# Altium PCB 海关全向控制器视频采集卡转接板V4.PcbDoc
Units mm, origin at the board's own origin, x right, y up, seen from the top; angles counter-clockwise.
Board outline 85.2 x 49.8 mm, 2 copper layers (Top Layer, Bottom Layer), stack 1.671 mm thick; 10 components, 11 nets, 53 pads, 668 vias.
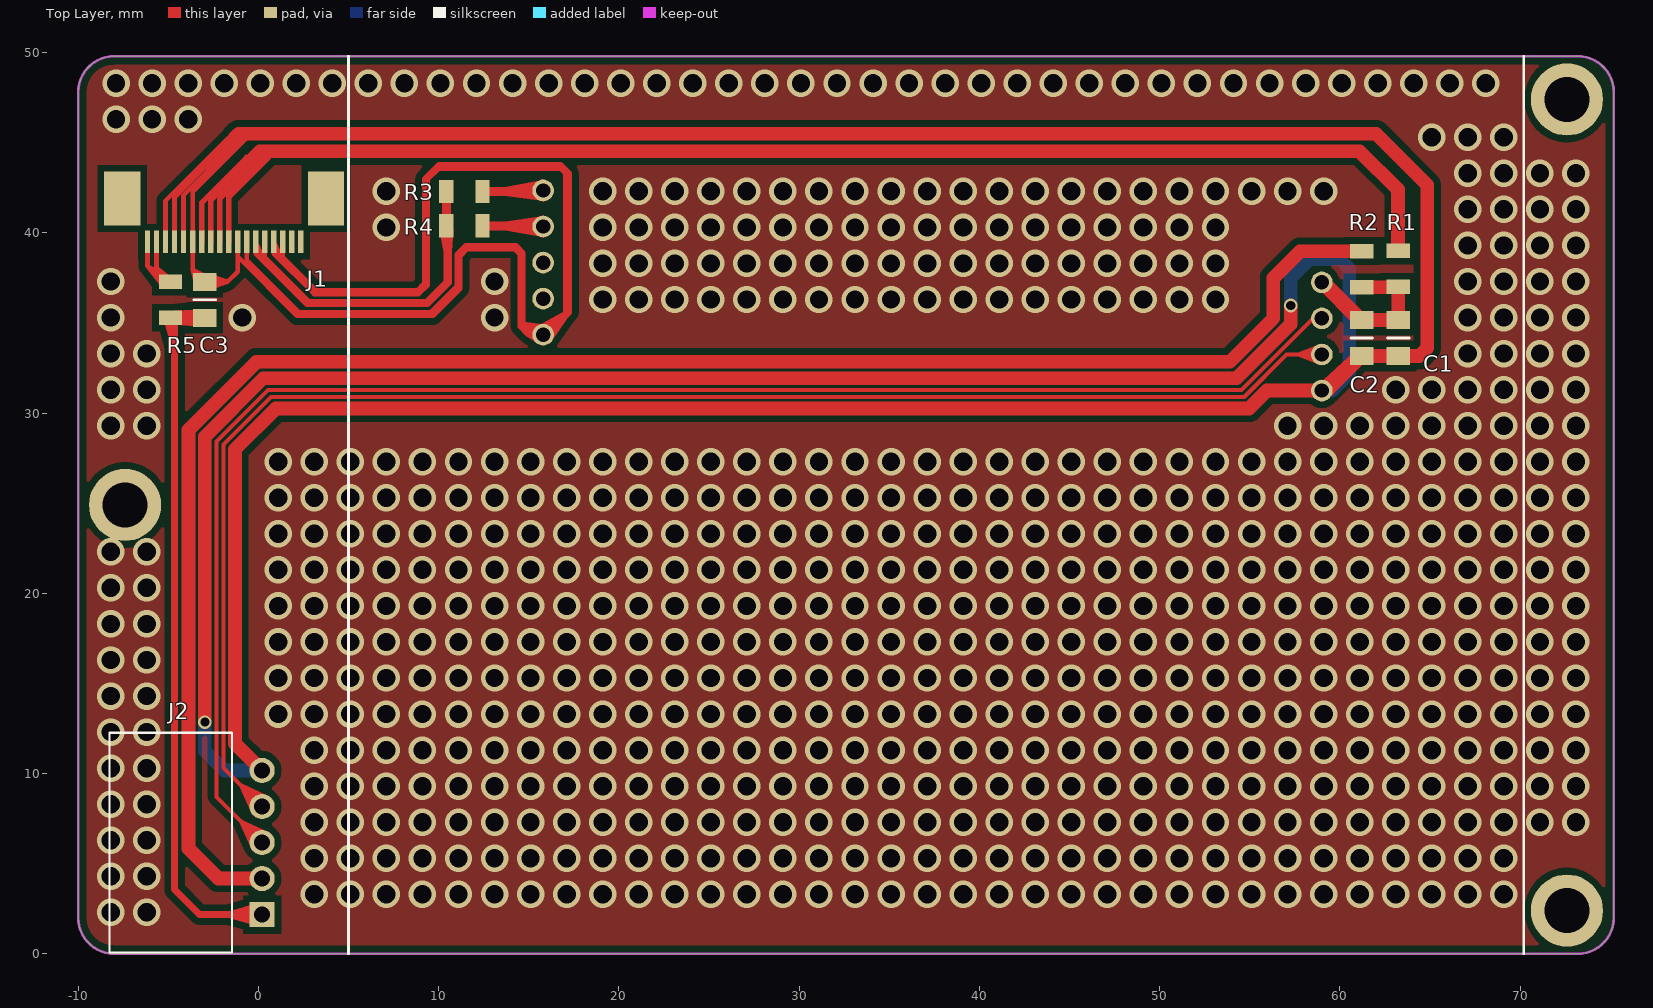
[diagram p0: Top Layer view]
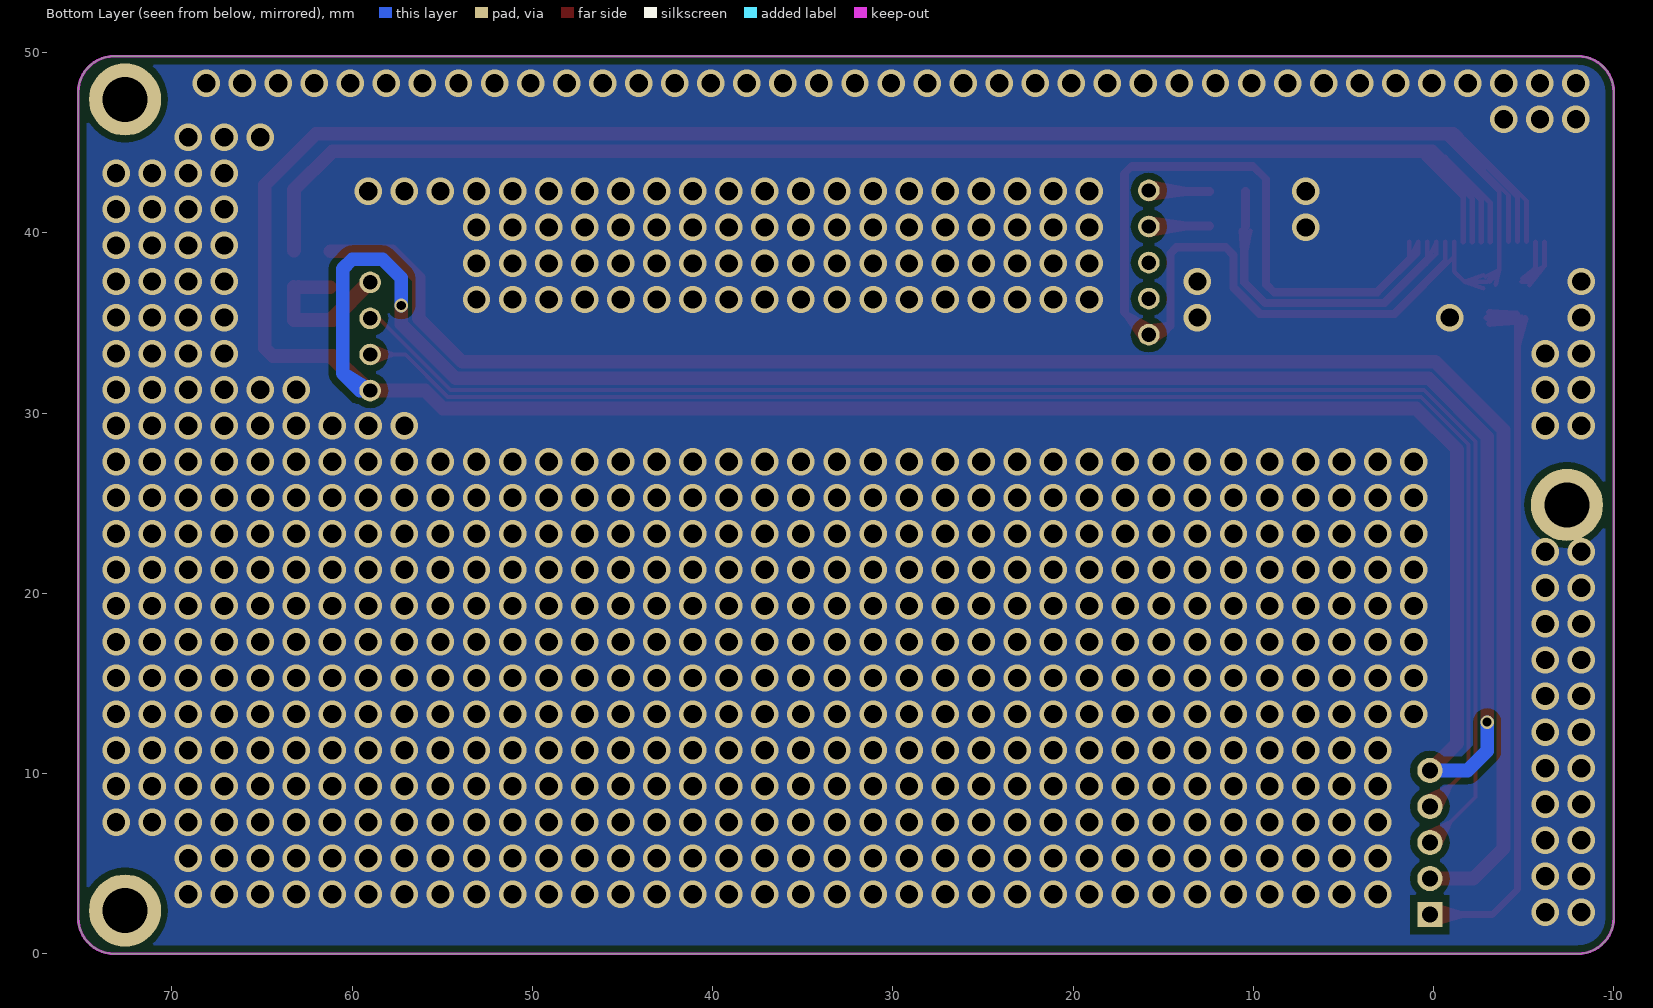
[diagram p1: Bottom Layer view, seen from below]
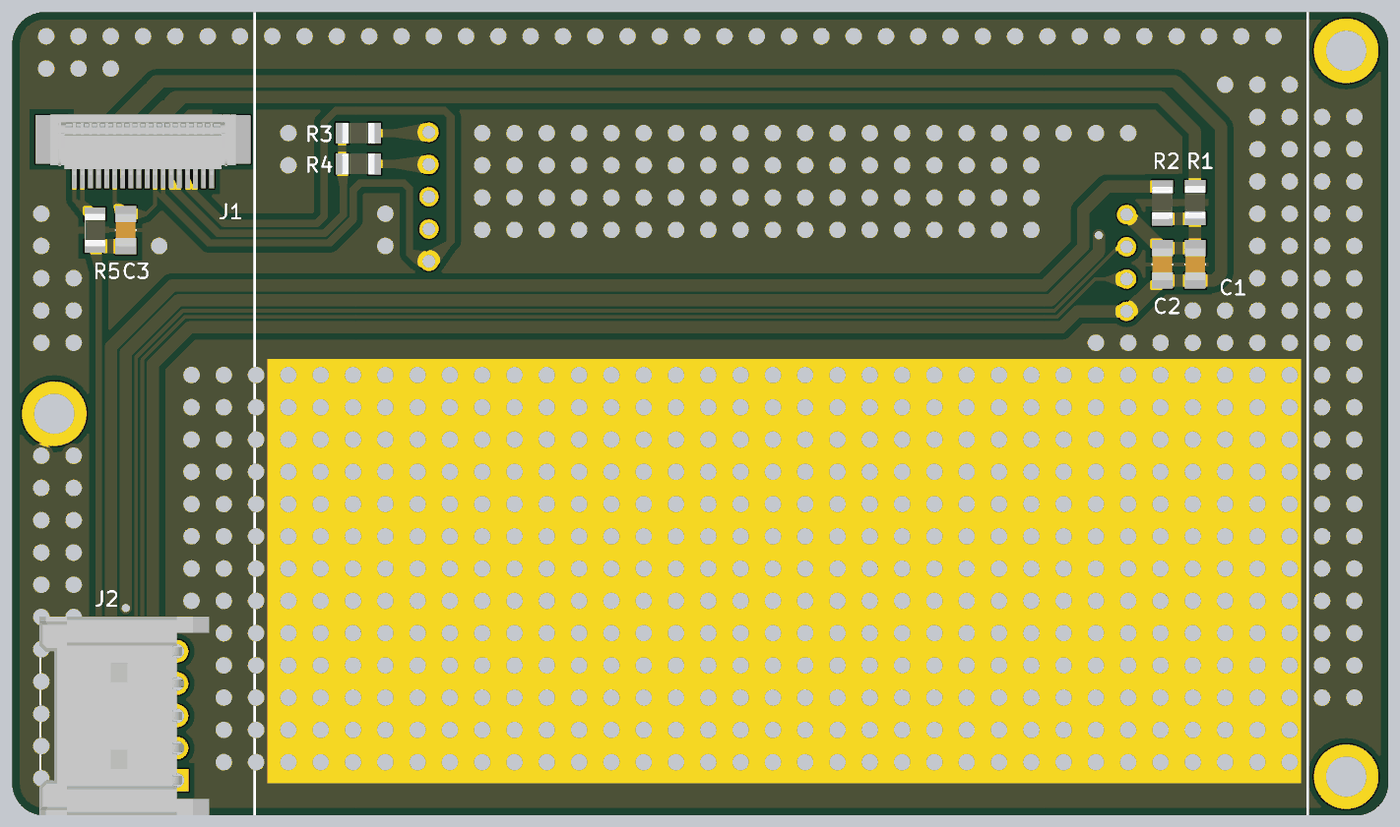
[diagram p2: 3D render of the assembled board from above, using the file's embedded part models]

## Layer stack, top to bottom
Top Solder: solder mask 0.0102, Solder Resist, Dk 3.5
Top Layer: signal copper 0.0356
Dielectric 1: dielectric 1.6, FR-4, Dk 4.8
Bottom Layer: signal copper 0.0356
Bottom Solder: solder mask 0.0102, Solder Resist, Dk 3.5

## Board outline
-10,2 ccw(c-8,2) -8,0 73.2,0 ccw(c73.2,2) 75.2,2 75.2,47.8 ccw(c73.2,47.8) 73.2,49.8 -8,49.8 ccw(c-8,47.8) -10,47.8

## Design rules (kind name [scope] priority, off if disabled: settings)
Clearance [All] p1: gap=0.152
DiffPairsRouting [All] p1: maxlimit=0.152 minlimit=0.152 mostfreqgap=0.152 toplayer_minwidth=0.229 toplayer_maxwidth=0.229 toplayer_prefwidth=0.229 bottomlayer_minwidth=0.229 bottomlayer_maxwidth=0.229 bottomlayer_prefwidth=0.229 maxuncoupledlength=12.7
MinimumSolderMaskSliver [All] p1: minsoldermaskwidth=0
PolygonConnect [All] p1: connectstyle=Relief reliefconductorwidth=0.254 reliefentries=4 polygonreliefangle="90 Angle" airgapwidth=0.254
RoutingVias [All] p1: holewidth=0.711 width=1.27 viastyle="Through Hole" minholewidth=0.254 minwidth=0.381 maxholewidth=3 maxwidth=5
SilkToSilkClearance [All] p1: silktosilkclearance=0.152
SilkToSolderMaskClearance [IsPad] p1: minsilkscreentomaskgap=0.152 clearancetoexposedcopper=TRUE
SolderMaskExpansion [All] p1: expansion=0.102
Width [All] p1: maxlimit=1.016 minlimit=0.203 preferedwidth=0.254
25 further rules are at their usual default settings.

## Classes and differential pairs
differential pair DATA: +DATA_P -DATA_N

## Components (designator, comment, footprint, x,y, rotation, side; value= is the part's Value field where it differs from the comment)
C1 "0.1uF" C0805 63.246,34.163 r90 top
C2 "10uF" C0805 61.214,34.163 r90 top
C3 "0.1uF" C0805 -2.972,36.284 r90 top
J1 "Jack 1x18" 0.5S-6X-18PB -1.905,40.704 r180 top
J2 "Jack 1x5" 35363-0560 0.203,6.172 r270 top
R1 "0R" R0805 63.246,37.998 r270 top
R2 "0R" R0805 61.214,37.973 r90 top
R3 "0R" R0805 11.43,42.291 r0 top
R4 "0R" R0805 11.43,40.386 r0 top
R5 "1K" R0805 -4.877,36.284 r270 top

## Footprints (in the part's own frame and the unit in brackets; to place one, negate y for a bottom-side part, rotate by r counter-clockwise, add the part's x,y. Pads: shape width x height; smd on the part's side, far side on the other; paste and mask are expansions set on the pad)
0.5S-6X-18PB [mm]
  rect 0.3x1.25 smd: 1(-4.25,1.2) 2(-3.75,1.2) 3(-3.25,1.2) 4(-2.75,1.2) 5(-2.25,1.2) 6(-1.75,1.2) 7(-1.25,1.2) 8(-0.75,1.2) 9(-0.25,1.2) 10(0.25,1.2) 11(0.75,1.2) 12(1.25,1.2) 13(1.75,1.2) 14(2.25,1.2) 15(2.75,1.2) 16(3.25,1.2) 17(3.75,1.2) 18(4.25,1.2)
  rect 2x3 smd: ""(-5.65,-1.2) ""(5.65,-1.2)
  body extent -5.75,-2.75 5.75,1, height 1.27
35363-0560 [mm]
  rect 1.4x1.4 hole 0.9: 1(4,0)
  round 1.4 hole 0.9: 2(2,0) 3(0,0) 4(-2,0) 5(-4,0)
  silkscreen extent -6.11,-8.46 6.1,-1.67, body extent -6.15,-8.52 6.15,1.98, height 5.75
C0805 [mm]
  rect 1x1.3 smd: 1(-1,0) 2(1,0)
  silkscreen extent 0,-0.6 0,0.6, body extent -1,-0.63 1,0.63, height 0.8
R0805 [mm]
  rect 0.8x1.3 smd: 1(-1,0) 2(1,0)
  body extent -1,-0.63 1,0.63, height 0.47

## Part data
C1 C2 C3: library part "Cap Semi"
J1 J2: "插座"
R1 R2 R3 R4 R5: library part Res, "Resistor"

## Free pads (board coordinates)
  round 1.2 hole 0.8: 1(15.8,42.35) 2(15.8,40.35) 3(15.8,38.35) 4(15.8,36.35) 5(15.8,34.35) 6(59,37.25) 7(59,35.25) 8(59,33.25) 9(59,31.25)
  round 4 hole 2.5: ""(-7.4,24.9) ""(72.6,2.4) ""(72.6,47.4)

## Via types
v1: diameter 1.524, hole 1.016, Top Layer to Bottom Layer, tented both sides, 666 vias
v2: diameter 0.762, hole 0.508, Top Layer to Bottom Layer, tented both sides, 2 vias

## Nets (pads, with @x,y where several pads share a name; then routed paths per layer and width w, separated by ;. In a path a pad name is that pad's centre, name@x,y a point inside that pad or via, vN(x,y) a via of type N, cw(c..) or ccw(c..) an arc to the next point about the centre after c; other vN are vias at no path point)
+5VA: J2.2 R2.2 | length 101.2
  Top Layer w0.762: J2.2 -2.216,4.172 -3.886,5.842 -3.886,29.064 -0.108,32.842 53.892,32.842 56.312,35.262 56.312,37.49 57.794,38.973 R2.2 ; 58.278,38.973 R2.2@60.964,38.973
+5VAOUT: C1.2 C2.2 pad.6 R1.2 R2.1 | length 28.4
  Top Layer w0.762: pad.6@59.02,37.231 61.064,35.163 pad.6@59.127,37.25 ; pad.6@59.127,37.25 pad.6 C2.2 ; pad.6@59.127,37.25 C2.2 ; C2.2 63.096,35.163 61.364,35.163 C1.2 ; C2.2 C1.2 ; R1.2@63.221,36.973 61.464,36.973 62.996,36.998 R2.1 R1.2@63.221,36.973 ; R1.2@63.221,36.973 R1.2 C1.2
DATA_N: J2.3 pad.7 | length 99.2
  Top Layer w0.229: J2.3@-0.277,5.837 -0.982,7.357 ; J2.3@-0.075,5.948 -0.982,7.357 ; J2.3@0.109,6.085 -0.982,7.357 ; J2.3@0.291,6.266 -0.982,7.357 ; J2.3@0.427,6.45 -0.982,7.357 ; J2.3@0.539,6.652 -0.982,7.357 ; pad.7 58.509,35.25 54.539,31.28 0.539,31.28 -2.324,28.417 -2.324,8.7 J2.3 -0.982,7.357
DATA_P: J2.4 pad.8 | length 102.1
  Top Layer w0.229: J2.4@-0.277,7.837 -0.982,9.357 ; J2.4@-0.075,7.948 -0.982,9.357 ; J2.4@0.109,8.085 -0.982,9.357 ; J2.4@0.291,8.266 -0.982,9.357 ; J2.4@0.427,8.45 -0.982,9.357 ; J2.4@0.539,8.652 -0.982,9.357 ; pad.8@58.908,32.773 57.714,33.25 ; pad.8@58.908,33.727 57.714,33.25 ; pad.8@58.974,32.994 57.714,33.25 ; pad.8@58.974,33.506 57.714,33.25 ; -0.982,9.357 J2.4 -1.943,10.318 -1.943,28.259 0.697,30.899 54.697,30.899 57.048,33.25 pad.8 57.714,33.25
GND: C1.1 C2.1 C3.2 J1.3 J1.4 J1.7 J1.8 J1.13 J1.14 J1.15 J1.16 J2.5 pad.5 pad.9 | length 474.6
  Top Layer w0.254: J1.16 -5.155,41.772 -1.676,45.251 -1.346,45.251 -4.655,41.942 J1.15 ; J1.16@-5.155,39.979 -5.155,40.891 ; J1.15@-4.655,39.979 -4.655,40.891 ; J1.14 -4.155,42.086 -1.168,45.073 ; J1.14@-4.155,39.979 -4.155,40.891 ; -3.655,38.117 J1.13@-3.655,39.029 ; J1.13@-3.655,39.979 -3.655,40.891 ; C3.2@-3.458,37.124 -3.655,37.968 ; C3.2@-3.122,37.284 -3.655,37.968 ; C3.2@-2.884,37.572 -3.655,37.968 ; C3.2@-2.822,37.284 -1.716,37.284 ; C3.2@-2.759,36.917 -1.716,37.284 ; C3.2@-2.759,37.652 -1.716,37.284 ; J1.8@-1.155,39.029 -1.155,38.684 ; J1.8 -1.155,38.684 ; J1.7@-0.655,39.029 -0.655,38.489 ; J1.7 -0.655,38.489 ; -0.411,45.5 -3.655,42.256 J1.13 -3.655,37.968 ; J1.3@1.345,39.029 1.345,38.655 ; J1.3 1.345,38.655 ; 1.406,38.282 J1.4 0.845,38.843 ; pad.5@15.498,33.986 14.7,34.957 ; pad.5@15.518,34.73 16.939,35.489 ; pad.5@15.567,34.761 17.034,35.322 ; pad.5@15.656,34.515 16.939,35.489 ; pad.5@15.668,33.896 14.95,34.35 ; pad.5@15.668,34.804 14.95,34.35 ; pad.5@15.677,34.531 17.034,35.322 ; pad.5@15.678,34.168 14.7,34.957 ; pad.5@15.772,34.133 14.95,34.35 ; pad.5@15.772,34.567 14.95,34.35 ; pad.5@15.889,34.55 14.7,34.957 ; pad.5@15.946,34.8 14.7,34.957 ; pad.5@15.947,34.188 17.034,35.322 ; pad.5@15.965,34.206 16.939,35.489 ; pad.5@16.145,34.027 17.034,35.322 ; pad.5@16.18,34.068 16.939,35.489 ; pad.5@16.316,34.604 17.272,35.56 17.272,43.307 16.764,43.815 10.015,43.815 9.2,43 9.2,37.2 8.8,36.8 3.2,36.8 1.345,38.655 ; -3.655,37.968 C3.2 -1.716,37.284 ; -1.716,37.284 -1.155,37.845 -1.155,38.684 ; -1.155,38.684 2.129,35.4 9.7,35.4 11.2,36.9 11.2,38.7 11.6,39.1 14.2,39.1 14.5,38.8 14.5,34.8 14.95,34.35 ; -0.655,38.489 2.24,35.594 9.568,35.594 11.006,37.032 11.006,38.806 11.5,39.3 14.3,39.3 14.7,38.9 14.7,34.957 ; 0.845,38.843 0.845,39.029 0.845,38.843 ; 0.845,38.843 3.082,36.606 8.906,36.606 9.4,37.1 9.4,42.961 10,43.561 16.764,43.561 17.018,43.307 17.018,35.568 pad.5 ; 14.7,34.957 pad.5 ; 14.7,34.957 pad.5@15.307,34.35 ; 14.95,34.35 pad.5 ; 14.95,34.35 pad.5@15.307,34.35 ; pad.5@15.307,34.35 pad.5 ; pad.5 17.034,35.322
  Top Layer w0.762: v2(-2.972,12.852) -2.972,28.685 0.271,31.928 54.271,31.928 57.277,34.934 ; -1.346,45.251 -1.097,45.5 -0.411,45.5 62,45.5 64.846,42.654 64.846,33.604 64.405,33.163 ; 56.114,31.25 pad.9 ; C1.1@63.396,33.163 64.405,33.163 ; -1.295,11.671 J2.5 -1.295,11.671 ; -1.295,11.671 -1.295,27.991 0.965,30.251 54.966,30.251 55.964,31.25 pad.9 ; 57.277,34.934 v2(57.277,35.966) 57.277,34.934 ; pad.9 61.064,33.163 pad.9@59.301,31.25 ; pad.9 C2.1 ; pad.9 pad.9@59.301,31.25 ; pad.9@59.301,31.25 C2.1 ; C2.1 63.096,33.163 61.364,33.163 C1.1 ; C2.1 C1.1 ; C1.1 64.405,33.163
  Bottom Layer w0.762: v2(-2.972,12.852) -2.972,11.252 -1.892,10.172 J2.5 ; v2(57.277,35.966) 57.277,37.49 58.318,38.532 59.995,38.532 60.528,37.998 60.528,32.207 ; 60.528,32.207 pad.9 59.571,31.25 60.528,32.207
NetJ1_9: J1.9 J1.10 J1.11 J1.12 R1.1 | length 97.9
  Top Layer w0.305: J1.12 -3.155,41.664 -0.635,44.184 ; J1.12@-3.155,39.979 -3.155,41.043 ; J1.11 -2.655,41.783 -0.254,44.184 ; J1.11@-2.655,39.979 -2.655,41.043 ; J1.10 -2.155,41.876 0.152,44.184 ; J1.10@-2.155,39.979 -2.155,41.043 ; J1.9 -1.655,41.97 0.559,44.184 ; J1.9@-1.655,39.979 -1.655,41.043
  Top Layer w0.762: 0.152,44.184 -0.254,44.184 0.083,44.521 61.1,44.521 63.221,42.4 R1.1@63.221,38.998 ; 63.221,41.685 R1.1
NetJ1_17: J1.17 J1.18 R5.1 | length 14.1
  Top Layer w0.254: J1.18@-6.155,39.029 -6.155,38.155 ; J1.18 -6.155,38.155 ; -5.655,38.117 J1.17@-5.655,39.029 ; J1.17 -5.655,38.063 ; R5.1@-5.373,37.165 -5.655,38.063 ; R5.1@-5.323,37.095 -6.133,38.133 ; R5.1@-4.973,37.51 -6.133,38.133 ; R5.1@-4.926,37.469 -5.655,38.063 ; -6.155,38.155 -5.284,37.284 R5.1 -5.655,38.063 ; -6.133,38.133 -5.127,37.284 -5.655,38.063
PADDET: C3.1 J2.1 R5.2 | length 71
  Top Layer w0.381: R5.2@-5.082,35.241 -4.648,33.682 ; R5.2@-4.668,35.301 -4.648,33.682 ; R5.2@-4.648,35.056 R5.2 ; R5.2@-4.648,35.284 -4.648,3.556 -3.264,2.172 J2.1 ; C3.1@-3.196,34.984 R5.2@-4.613,35.493 ; C3.1@-3.196,35.585 R5.2@-4.613,35.075 ; C3.1@-3.154,34.977 R5.2@-4.627,35.284 ; C3.1@-3.154,35.592 R5.2@-4.627,35.284 ; C3.1@-3.151,34.976 R5.2@-4.765,35.284 ; C3.1@-3.151,35.593 R5.2@-4.765,35.284 ; C3.1@-3.111,34.975 R5.2@-4.613,35.075 ; C3.1@-3.111,35.594 R5.2@-4.613,35.493 ; C3.1 R5.2 ; J2.1@0.133,1.668 -1.64,2.172 J2.1@0.133,2.677 ; R5.2 -4.648,33.682 ; R5.2@-4.765,35.284 C3.1@-3.122,35.284 ; R5.2@-4.627,35.284 C3.1@-3.122,35.284 ; R5.2@-4.627,35.284 C3.1@-3.084,35.284 ; R5.2@-4.613,35.075 C3.1@-3.122,35.284 ; R5.2@-4.613,35.075 C3.1@-3.084,35.284 ; R5.2@-4.613,35.493 C3.1@-3.122,35.284 ; R5.2@-4.613,35.493 C3.1@-3.084,35.284
VEDIO: J1.5 J1.6 R3.1 R4.1 | length 47.7
  Top Layer w0.254: J1.5@0.345,39.029 0.345,38.655 ; J1.5 0.345,38.655 ; 0.407,38.265 J1.6 -0.155,38.827 ; R4.1@10.158,40.111 10.4,38.974 ; R4.1@10.166,40.066 10.6,38.955 ; R4.1@10.7,40.097 10.4,38.974 ; R4.1@10.703,40.144 10.6,38.955 ; -0.155,38.827 -0.155,39.029 -0.155,38.827 ; -0.155,38.827 2.672,36 9.4,36 10.6,37.2 10.6,40.216 R4.1 10.4,40.356 10.4,37.3 9.3,36.2 2.8,36.2 0.345,38.655 ; 10.4,38.974 10.43,40.136 10.6,38.955
  Top Layer w0.508: R4.1 10.43,42.041 10.43,40.636 R3.1 R4.1
VEDIO1: pad.1 R3.2 | length 9.8
  Top Layer w0.508: R3.2 15.741,42.291 pad.1 13.674,42.291 ; pad.1@15.762,42.694 13.674,42.291 ; pad.1@15.781,42.005 13.674,42.291
VEDIO2: pad.2 R4.2 | length 9.8
  Top Layer w0.508: R4.2 15.764,40.386 pad.2 13.675,40.386 ; pad.2@15.766,40.006 13.675,40.386 ; pad.2@15.778,40.695 13.675,40.386
pads on no net: J1. J1.1 J1.2
copper on no net:
  other v1: -8.2,2.3 -6.2,2.3 3.1,3.3 5.1,3.3 7.1,3.3 9.1,3.3 11.1,3.3 13.1,3.3 15.1,3.3 17.1,3.3 19.1,3.3 21.1,3.3 23.1,3.3 25.1,3.3 27.1,3.3 29.1,3.3 31.1,3.3 33.1,3.3 35.1,3.3 37.1,3.3 39.1,3.3 41.1,3.3 43.1,3.3 45.1,3.3 47.1,3.3 49.1,3.3 51.1,3.3 53.1,3.3 55.1,3.3 57.1,3.3 59.1,3.3 61.1,3.3 63.1,3.3 65.1,3.3 67.1,3.3 69.1,3.3 -8.2,4.3 -6.2,4.3 3.1,5.3 5.1,5.3 7.1,5.3 9.1,5.3 11.1,5.3 13.1,5.3 15.1,5.3 17.1,5.3 19.1,5.3 21.1,5.3 23.1,5.3 25.1,5.3 27.1,5.3 29.1,5.3 31.1,5.3 33.1,5.3 35.1,5.3 37.1,5.3 39.1,5.3 41.1,5.3 43.1,5.3 45.1,5.3 47.1,5.3 49.1,5.3 51.1,5.3 53.1,5.3 55.1,5.3 57.1,5.3 59.1,5.3 61.1,5.3 63.1,5.3 65.1,5.3 67.1,5.3 69.1,5.3 -8.2,6.3 -6.2,6.3 3.1,7.3 5.1,7.3 7.1,7.3 9.1,7.3 11.1,7.3 13.1,7.3 15.1,7.3 17.1,7.3 19.1,7.3 21.1,7.3 23.1,7.3 25.1,7.3 27.1,7.3 29.1,7.3 31.1,7.3 33.1,7.3 35.1,7.3 37.1,7.3 39.1,7.3 41.1,7.3 43.1,7.3 45.1,7.3 47.1,7.3 49.1,7.3 51.1,7.3 53.1,7.3 55.1,7.3 57.1,7.3 59.1,7.3 61.1,7.3 63.1,7.3 65.1,7.3 67.1,7.3 69.1,7.3 71.1,7.3 73.1,7.3 -8.2,8.3 -6.2,8.3 3.1,9.3 5.1,9.3 7.1,9.3 9.1,9.3 11.1,9.3 13.1,9.3 15.1,9.3 17.1,9.3 19.1,9.3 21.1,9.3 23.1,9.3 25.1,9.3 27.1,9.3 29.1,9.3 31.1,9.3 33.1,9.3 35.1,9.3 37.1,9.3 39.1,9.3 41.1,9.3 43.1,9.3 45.1,9.3 47.1,9.3 49.1,9.3 51.1,9.3 53.1,9.3 55.1,9.3 57.1,9.3 59.1,9.3 61.1,9.3 63.1,9.3 65.1,9.3 67.1,9.3 69.1,9.3 71.1,9.3 73.1,9.3 -8.2,10.3 -6.2,10.3 3.1,11.3 5.1,11.3 7.1,11.3 9.1,11.3 11.1,11.3 13.1,11.3 15.1,11.3 17.1,11.3 19.1,11.3 21.1,11.3 23.1,11.3 25.1,11.3 27.1,11.3 29.1,11.3 31.1,11.3 33.1,11.3 35.1,11.3 37.1,11.3 39.1,11.3 41.1,11.3 43.1,11.3 45.1,11.3 47.1,11.3 49.1,11.3 51.1,11.3 53.1,11.3 55.1,11.3 57.1,11.3 59.1,11.3 61.1,11.3 63.1,11.3 65.1,11.3 67.1,11.3 69.1,11.3 71.1,11.3 73.1,11.3 -8.2,12.3 -6.2,12.3 1.1,13.3 3.1,13.3 5.1,13.3 7.1,13.3 9.1,13.3 11.1,13.3 13.1,13.3 15.1,13.3 17.1,13.3 19.1,13.3 21.1,13.3 23.1,13.3 25.1,13.3 27.1,13.3 29.1,13.3 31.1,13.3 33.1,13.3 35.1,13.3 37.1,13.3 39.1,13.3 41.1,13.3 43.1,13.3 45.1,13.3 47.1,13.3 49.1,13.3 51.1,13.3 53.1,13.3 55.1,13.3 57.1,13.3 59.1,13.3 61.1,13.3 63.1,13.3 65.1,13.3 67.1,13.3 69.1,13.3 71.1,13.3 73.1,13.3 -8.2,14.3 -6.2,14.3 1.1,15.3 3.1,15.3 5.1,15.3 7.1,15.3 9.1,15.3 11.1,15.3 13.1,15.3 15.1,15.3 17.1,15.3 19.1,15.3 21.1,15.3 23.1,15.3 25.1,15.3 27.1,15.3 29.1,15.3 31.1,15.3 33.1,15.3 35.1,15.3 37.1,15.3 39.1,15.3 41.1,15.3 43.1,15.3 45.1,15.3 47.1,15.3 49.1,15.3 51.1,15.3 53.1,15.3 55.1,15.3 57.1,15.3 59.1,15.3 61.1,15.3 63.1,15.3 65.1,15.3 67.1,15.3 69.1,15.3 71.1,15.3 73.1,15.3 -8.2,16.3 -6.2,16.3 1.1,17.3 3.1,17.3 5.1,17.3 7.1,17.3 9.1,17.3 11.1,17.3 13.1,17.3 15.1,17.3 17.1,17.3 19.1,17.3 21.1,17.3 23.1,17.3 25.1,17.3 27.1,17.3 29.1,17.3 31.1,17.3 33.1,17.3 35.1,17.3 37.1,17.3 39.1,17.3 41.1,17.3 43.1,17.3 45.1,17.3 47.1,17.3 49.1,17.3 51.1,17.3 53.1,17.3 55.1,17.3 57.1,17.3 59.1,17.3 61.1,17.3 63.1,17.3 65.1,17.3 67.1,17.3 69.1,17.3 71.1,17.3 73.1,17.3 -8.2,18.3 -6.2,18.3 1.1,19.3 3.1,19.3 5.1,19.3 7.1,19.3 9.1,19.3 11.1,19.3 13.1,19.3 15.1,19.3 17.1,19.3 19.1,19.3 21.1,19.3 23.1,19.3 25.1,19.3 27.1,19.3 29.1,19.3 31.1,19.3 33.1,19.3 35.1,19.3 37.1,19.3 39.1,19.3 41.1,19.3 43.1,19.3 45.1,19.3 47.1,19.3 49.1,19.3 51.1,19.3 53.1,19.3 55.1,19.3 57.1,19.3 59.1,19.3 61.1,19.3 63.1,19.3 65.1,19.3 67.1,19.3 69.1,19.3 71.1,19.3 73.1,19.3 -8.2,20.3 -6.2,20.3 1.1,21.3 3.1,21.3 5.1,21.3 7.1,21.3 9.1,21.3 11.1,21.3 13.1,21.3 15.1,21.3 17.1,21.3 19.1,21.3 21.1,21.3 23.1,21.3 25.1,21.3 27.1,21.3 29.1,21.3 31.1,21.3 33.1,21.3 35.1,21.3 37.1,21.3 39.1,21.3 41.1,21.3 43.1,21.3 45.1,21.3 47.1,21.3 49.1,21.3 51.1,21.3 53.1,21.3 55.1,21.3 57.1,21.3 59.1,21.3 61.1,21.3 63.1,21.3 65.1,21.3 67.1,21.3 69.1,21.3 71.1,21.3 73.1,21.3 -8.2,22.3 -6.2,22.3 1.1,23.3 3.1,23.3 5.1,23.3 7.1,23.3 9.1,23.3 11.1,23.3 13.1,23.3 15.1,23.3 17.1,23.3 19.1,23.3 21.1,23.3 23.1,23.3 25.1,23.3 27.1,23.3 29.1,23.3 31.1,23.3 33.1,23.3 35.1,23.3 37.1,23.3 39.1,23.3 41.1,23.3 43.1,23.3 45.1,23.3 47.1,23.3 49.1,23.3 51.1,23.3 53.1,23.3 55.1,23.3 57.1,23.3 59.1,23.3 61.1,23.3 63.1,23.3 65.1,23.3 67.1,23.3 69.1,23.3 71.1,23.3 73.1,23.3 1.1,25.3 3.1,25.3 5.1,25.3 7.1,25.3 9.1,25.3 11.1,25.3 13.1,25.3 15.1,25.3 17.1,25.3 19.1,25.3 21.1,25.3 23.1,25.3 25.1,25.3 27.1,25.3 29.1,25.3 31.1,25.3 33.1,25.3 35.1,25.3 37.1,25.3 39.1,25.3 41.1,25.3 43.1,25.3 45.1,25.3 47.1,25.3 49.1,25.3 51.1,25.3 53.1,25.3 55.1,25.3 57.1,25.3 59.1,25.3 61.1,25.3 63.1,25.3 65.1,25.3 67.1,25.3 69.1,25.3 71.1,25.3 73.1,25.3 1.1,27.3 3.1,27.3 5.1,27.3 7.1,27.3 9.1,27.3 11.1,27.3 13.1,27.3 15.1,27.3 17.1,27.3 19.1,27.3 21.1,27.3 23.1,27.3 25.1,27.3 27.1,27.3 29.1,27.3 31.1,27.3 33.1,27.3 35.1,27.3 37.1,27.3 39.1,27.3 41.1,27.3 43.1,27.3 45.1,27.3 47.1,27.3 49.1,27.3 51.1,27.3 53.1,27.3 55.1,27.3 57.1,27.3 59.1,27.3 61.1,27.3 63.1,27.3 65.1,27.3 67.1,27.3 69.1,27.3 71.1,27.3 73.1,27.3 -8.2,29.3 -6.2,29.3 57.1,29.3 59.1,29.3 61.1,29.3 63.1,29.3 65.1,29.3 67.1,29.3 69.1,29.3 71.1,29.3 73.1,29.3 -8.2,31.3 -6.2,31.3 63.1,31.3 65.1,31.3 67.1,31.3 69.1,31.3 71.1,31.3 73.1,31.3 -8.2,33.3 -6.2,33.3 67.1,33.3 69.1,33.3 71.1,33.3 73.1,33.3 -8.2,35.3 -0.9,35.3 13.1,35.3 67.1,35.3 69.1,35.3 71.1,35.3 73.1,35.3 19.1,36.3 21.1,36.3 23.1,36.3 25.1,36.3 27.1,36.3 29.1,36.3 31.1,36.3 33.1,36.3 35.1,36.3 37.1,36.3 39.1,36.3 41.1,36.3 43.1,36.3 45.1,36.3 47.1,36.3 49.1,36.3 51.1,36.3 53.1,36.3 -8.2,37.3 13.1,37.3 67.1,37.3 69.1,37.3 71.1,37.3 73.1,37.3 19.1,38.3 21.1,38.3 23.1,38.3 25.1,38.3 27.1,38.3 29.1,38.3 31.1,38.3 33.1,38.3 35.1,38.3 37.1,38.3 39.1,38.3 41.1,38.3 43.1,38.3 45.1,38.3 47.1,38.3 49.1,38.3 51.1,38.3 53.1,38.3 67.1,39.3 69.1,39.3 71.1,39.3 73.1,39.3 7.1,40.3 19.1,40.3 21.1,40.3 23.1,40.3 25.1,40.3 27.1,40.3 29.1,40.3 31.1,40.3 33.1,40.3 35.1,40.3 37.1,40.3 39.1,40.3 41.1,40.3 43.1,40.3 45.1,40.3 47.1,40.3 49.1,40.3 51.1,40.3 53.1,40.3 67.1,41.3 69.1,41.3 71.1,41.3 73.1,41.3 7.1,42.3 19.1,42.3 21.1,42.3 23.1,42.3 25.1,42.3 27.1,42.3 29.1,42.3 31.1,42.3 33.1,42.3 35.1,42.3 37.1,42.3 39.1,42.3 41.1,42.3 43.1,42.3 45.1,42.3 47.1,42.3 49.1,42.3 51.1,42.3 53.1,42.3 55.1,42.3 57.1,42.3 59.1,42.3 67.1,43.3 69.1,43.3 71.1,43.3 73.1,43.3 65.1,45.3 67.1,45.3 69.1,45.3 -7.9,46.3 -5.9,46.3 -3.9,46.3 -7.9,48.3 -5.9,48.3 -3.9,48.3 -1.9,48.3 0.1,48.3 2.1,48.3 4.1,48.3 6.1,48.3 8.1,48.3 10.1,48.3 12.1,48.3 14.1,48.3 16.1,48.3 18.1,48.3 20.1,48.3 22.1,48.3 24.1,48.3 26.1,48.3 28.1,48.3 30.1,48.3 32.1,48.3 34.1,48.3 36.1,48.3 38.1,48.3 40.1,48.3 42.1,48.3 44.1,48.3 46.1,48.3 48.1,48.3 50.1,48.3 52.1,48.3 54.1,48.3 56.1,48.3 58.1,48.3 60.1,48.3 62.1,48.3 64.1,48.3 66.1,48.3 68.1,48.3

## Polygon pours and split planes (outlines as drawn)
no net on Top Layer "Top Layer-No Net" (solid, pour order 8): -10,49.8 75.2,49.8 75.2,0 -10,0
no net on Bottom Layer "Top Layer-No Net" (solid, pour order 10): -10,49.8 -10,0 75.2,0 75.2,49.8

## Keep-outs
Keep-Out Layer:
  the board outline again, w0.152

## Silkscreen, mask and mechanical layers (free items; w line width, h text height)
Top Overlay:
  lines w0.152: 5,0 5,49.8 ; 70.2,0 70.2,49.8
Top Solder:
  rectangle: 5.8,2 69.8,28.3
Bottom Solder:
  rectangle: 5.8,1.9 69.8,28.3